# Altium PCB ATLAS_XP2V5.2016.11.14.PcbDoc (part 3 of 3)
Units mil, origin at the board's own origin, x right, y up, seen from the top; angles counter-clockwise.
Board outline 6300 x 9190 mil, 4 copper layers (Primary Component Side, Ground Plane, Power Plane, Secondary Component Side), stack 35.4 mil thick; 150 components, 213 nets, 1050 pads, 279 vias.
Unrouted connection lines stored in the file: 24.
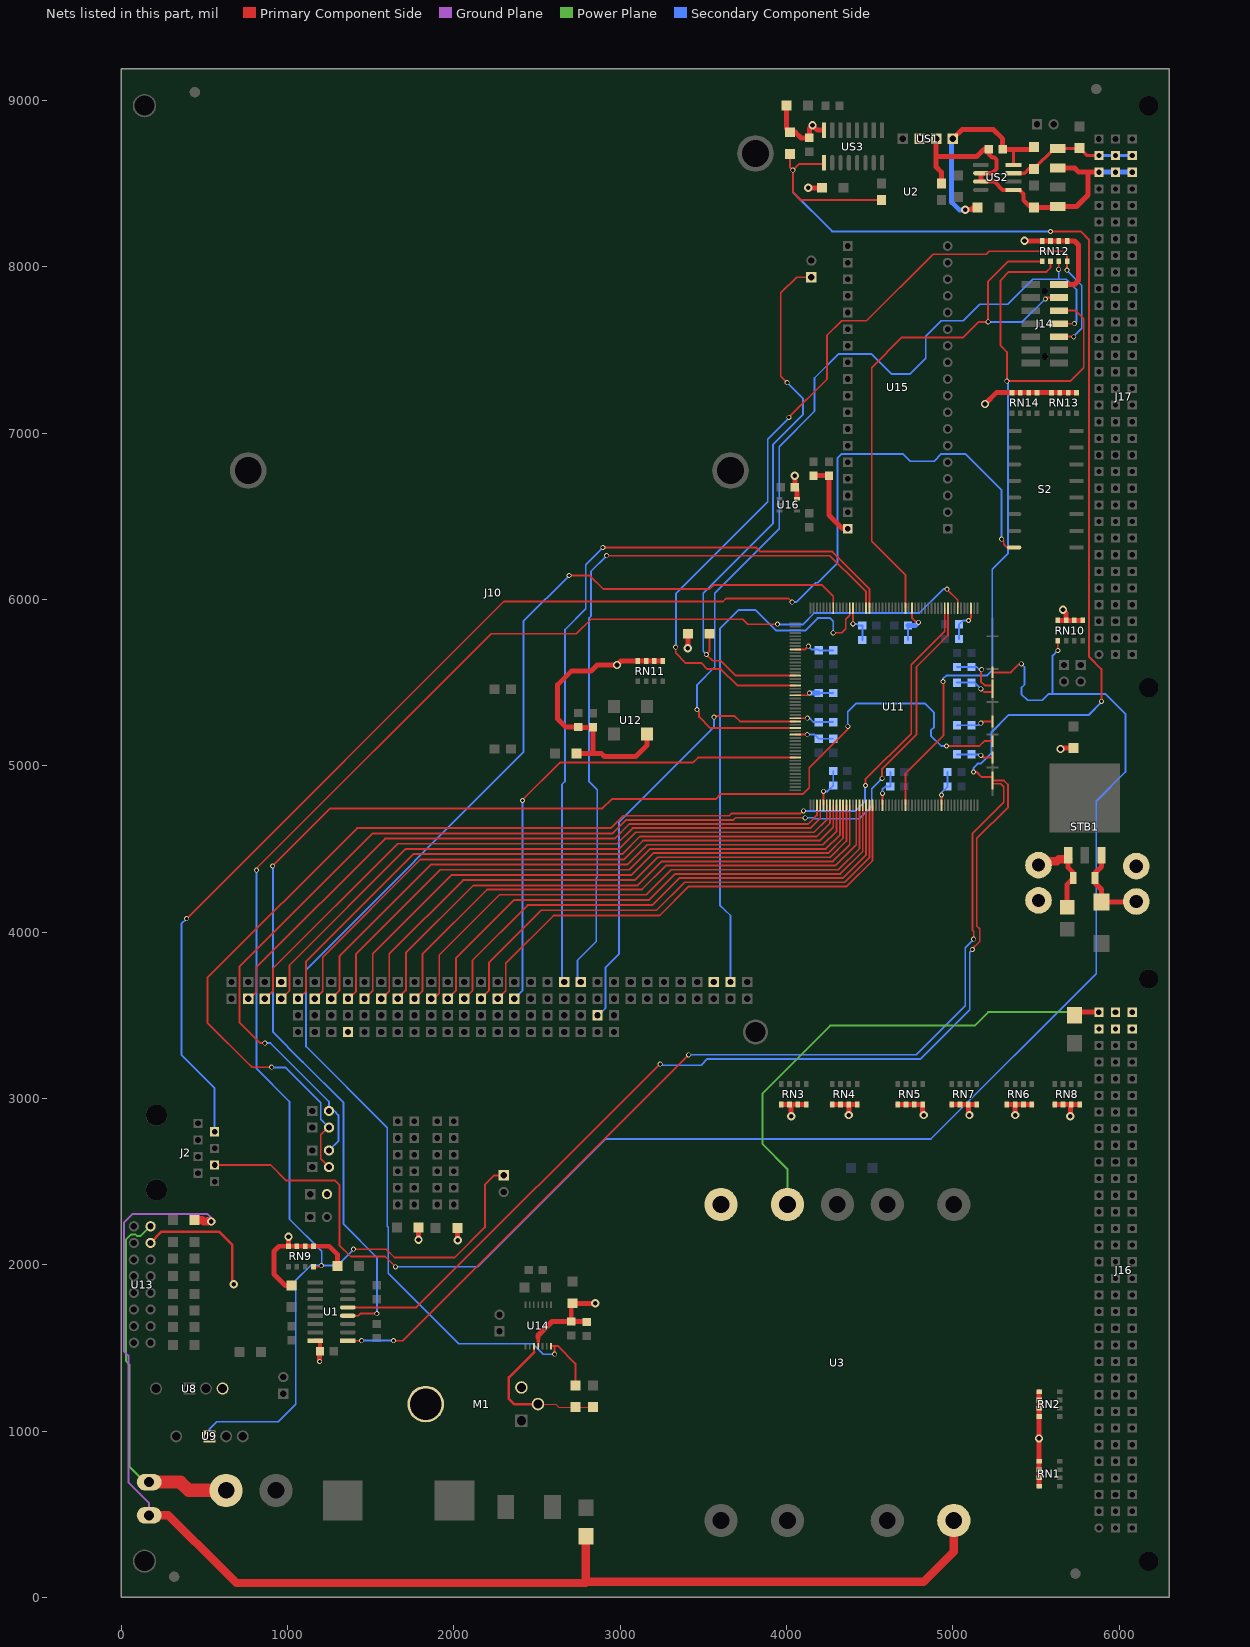
[diagram p5: the nets of this part, all layers, seen from the top]

## Via types
v1: diameter 30, hole 20, Primary Component Side to Secondary Component Side, 245 vias
v2: diameter 50, hole 28, Primary Component Side to Secondary Component Side, 34 vias

## Nets (pads, with @x,y where several pads share a name; then routed paths per layer and width w, separated by ;. In a path a pad name is that pad's centre, name@x,y a point inside that pad or via, vN(x,y) a via of type N, cw(c..) or ccw(c..) an arc to the next point about the centre after c; other vN are vias at no path point) (continued)
PPM_-485: J17.A2 J17.B2 J17.C2 R25.2 R32.2 US2.7 ZD3.2 | length 795.1
  Primary Component Side w20: US2.7@5364.75,8562.5 5431.25,8562.5 5457.5,8588.75 R25.2@5487.5,8588.75 5609.5,8710.75 ZD3.2@5631.25,8710.75 5759.5,8710.75 R32.2@5762.5,8713.75 5807.75,8668.5 J17.C2@5878.5,8668.5
  Secondary Component Side w20: J17.C2@5878.5,8668.5 J17.B2@5978.5,8668.5 J17.A2@6078.5,8668.5
PPM_GND: C1.2 J17.A3 J17.B3 J17.C3 R31.2 U2.2 US1.3 US2.2 US2.3 US2.5 ZD2.1 ZD3.1 | length 2270.7
  Primary Component Side w25: 5168.75,8525 US2.3@5168.75,8512.5 5250,8512.5 5300,8462.5 US2.5@5364.75,8462.5 5400,8462.5 5425,8437.5 5425,8400 5467.5,8357.5 R31.2@5487.5,8357.5 ; US2.2@5168.75,8550 US2.2@5168.75,8562.5 5237.5,8562.5 5262.5,8587.5 5262.5,8643.75 5250,8656.25 5237.5,8656.25 5216,8677.75 C1.2@5216,8706.25
  Primary Component Side w30: US1.3@4900,8768.75 4900,8662.5 ; U2.2@4931.25,8500 4931.25,8568.75 4900,8600 4900,8662.5 ; 5168.75,8525 US2.2@5168.75,8550 ; C1.2@5216,8706.25 5187.5,8706.25 5143.75,8662.5 4900,8662.5 ; R31.2@5487.5,8357.5 5626.25,8357.5 ZD2.1@5631.25,8362.5 5743.75,8362.5 5812.5,8431.25 5812.5,8568.5 ; ZD3.1@5631.25,8593.75 5731.25,8593.75 5756.5,8568.5 5812.5,8568.5 ; J17.C3@5878.5,8568.5 5812.5,8568.5
  Secondary Component Side w30: J17.C3@5878.5,8568.5 J17.B3@5978.5,8568.5 J17.A3@6078.5,8568.5
PPM_NOVI: R2.2 U2.4 U11.57 US3.1 | length 6994.9
  Primary Component Side w12: R2.2@4021.25,8678.75 4021.25,8597.5 4037.5,8581.25 4037.75,8581.25 v1(4038,8581) ; US3.1@4225,8625 4218.75,8618.75 4075.75,8618.75 v1(4038,8581) ; U2.4@4571.25,8400 4087.5,8400 4038,8450.5 v1(4038,8581) ; v1(5125,4962.5) 5143.75,4962.5 5174.95,4931.3 U11.57@5238.45,4931.3 ; v1(5587.5,8212.5) 5768.75,8212.5 5818.75,8162.5 5818.75,5656.25 5893.75,5581.25 v1(5893.75,5387.5)
  Secondary Component Side w12: v1(4038,8581) 4038,8449.5 4275,8212.5 v1(5587.5,8212.5) ; v1(5125,4962.5) 5125,4987.5 5150,5012.5 5168.75,5012.5 5231.25,5075 5231.25,5200 5337.5,5306.25 5818.75,5306.25 5893.75,5381.25 v1(5893.75,5387.5)
PPM_VCC: C1.1 R1.1 R25.1 US1.4 US2.8 | length 1261.3
  Primary Component Side w20: 5362.5,8706.25 5364.75,8704 US2.8@5364.75,8612.5
  Primary Component Side w30: US1.4@5000,8768.75 5056.25,8825 5243.75,8825 5300,8768.75 C1.1@5300,8706.25 5362.5,8706.25 5475,8706.25 R25.1@5487.5,8718.75 ; v2(5075,8342) 5076.75,8343.75 5112.5,8343.75 5125,8356.25 R1.1@5150,8356.25
  Secondary Component Side w30: US1.4@5000,8768.75 4993.75,8762.5 4993.75,8387.5 5039.25,8342 v2(5075,8342)
PWR_GOOD_TPS: R28.2 U11.149 U14.14 | length 8361.3
  Primary Component Side w11: U14.14@2584.78,1508.98 2588.3,1512.5 2606.25,1512.5 ; v1(2606.25,1462.5) 2606.25,1512.5 ; v1(2693.75,6143.75) 2818.75,6143.75 2900,6062.5 3537.5,6062.5 3562.5,6087.5 4212.5,6087.5 4281.65,6018.35 U11.149@4281.65,5947.2 ; R28.2@2731.25,1273.75 2731.25,1406.25 2625,1512.5 2606.25,1512.5
  Secondary Component Side w11: v1(2606.25,1462.5) 2537.5,1462.5 2475,1525 2031.25,1525 1606.25,1950 1606.25,2225 1600,2231.25 1600,2825 1112.5,3312.5 1112.5,3775 2418.75,5081.25 2418.75,5868.75 v1(2693.75,6143.75)
RES_DRV: J10.B2 U11.144 | length 3258.2
  Primary Component Side w11: v1(4281,5799) 4282,5800 4331.25,5800 4356.25,5825 4356.25,5881.25 4380.15,5905.15 U11.144@4380.15,5947.2
  Secondary Component Side w11: J10.B2@3663.75,3700 3663.75,4100 3600,4162.5 3600,5825 3712.5,5937.5 3812.5,5937.5 3937.5,5812.5 4112.5,5812.5 4187.5,5887.5 4262.5,5887.5 4281.25,5868.75 4281.25,5799.25 v1(4281,5799)
RESERVE1: J5.2 J6.2 U11.114 | length 7016
  Primary Component Side w11: v1(864,3332) 863,3333 835.75,3333 712.5,3456.25 712.5,3793.75 1512.5,4593.75 2956.25,4593.75 3037.5,4675 3681.25,4675 3693.75,4687.5 v1(4112.5,4687.5) ; v1(4575,4925) 4575,4981.25 4781.25,5187.5 4781.25,5593.75 4971.15,5783.65 U11.114@4971.15,5947.2
  Secondary Component Side w11: v1(864,3332) 865,3333 898.25,3333 1250,2981.25 J5.2@1250,2925 1281.25,2925 1306.25,2900 1306.25,2743.75 J6.2@1250,2687.5 ; v1(4112.5,4687.5) 4162.5,4687.5 4168.75,4681.25 4437.5,4681.25 4512.5,4756.25 4512.5,4862.5 v1(4575,4925)
RESERVE2: J7.2 J8.2 U11.115 | length 7356
  Primary Component Side w11: v1(905,3188) 787.5,3188 775.5,3200 775,3200 518.75,3456.25 518.75,3725 1418.75,4625 2943.75,4625 3018.75,4700 3656.25,4700 3668.75,4712.5 4083.5,4712.5 4100,4729 v1(4103,4729) ; J7.2@1250,2587.5 1200,2637.5 1200,2781.25 1243.75,2825 J8.2@1250,2825 ; v1(4475,4881.25) 4475,4918.75 4750,5193.75 4750,5606.25 4951.45,5807.7 U11.115@4951.45,5947.2
  Secondary Component Side w11: v1(905,3188) 906,3187 986.25,3187 1142,3031.25 1143.75,3031.25 1200,2975 1200,2875 J8.2@1250,2825 ; v1(4103,4729) 4416.5,4729 4471.75,4784.25 4471.75,4878 v1(4475,4881.25)
RESET_CPU: JP5.1 RN9.8 U9.1 U11.111 | length 10688.1
  Primary Component Side w11: v1(814,4372) 814,4382.75 2225,5793.75 2737.5,5793.75 2825,5881.25 3737.5,5881.25 3767.75,5851 v1(3946,5851) ; RN9.8@1156.25,1988.5 1199,1988.5 1204,1993.5 v1(1204,1995) ; v1(1397.5,2093.75) 1593.75,2093.75 1643.75,2043.75 2006.25,2043.75 2187.5,2225 2187.5,2481.25 2243.75,2537.5 JP5.1@2300,2537.5 ; v1(4965,6062) 5030.25,5996.75 U11.111@5030.25,5947.2
  Secondary Component Side w11: U9.1@531.25,968.75 531.25,1012.5 575,1056.25 943.75,1056.25 1050,1162.5 1050,1906.25 1138.75,1995 v1(1204,1995) ; v1(814,4372) 815,4371 815,3178.85 1012.5,2981.1 1012.5,2275 1206.25,2081.25 1206.25,1997.25 v1(1204,1995) ; v1(1397.5,2093.75) 1298.75,1995 v1(1204,1995) ; v1(3946,5851) 3947,5850 4100,5850 4168.75,5918.75 4800,5918.75 4943.25,6062 v1(4965,6062)
RST_DOF_EN: J18.1 R30.1 U11.173 | length 3429.5
  Primary Component Side w11: R30.1@3537.5,5793.75 3537.5,5687.5 v1(3518.75,5668.75) 3556.25,5631.25 3606.25,5631.25 3695.5,5542 U11.173@4053.75,5542 ; v1(4004,7303) 3966,7341 3966,7843.75 4062.5,7937.5 J18.1@4150,7937.5
  Secondary Component Side w11: v1(3518.75,5668.75) 3500,5687.5 3500,6037.5 3918.75,6456.25 3918.75,6931.25 4100,7112.5 4100,7206.9 4004,7301.65 v1(4004,7303)
SA0: J10.A31 U11.3 | length 4024.3
  Primary Component Side w11: J10.A31@763.75,3600 775,3600 812.5,3637.5 812.5,3787.5 1587.5,4562.5 2968.75,4562.5 3056.25,4650 4131.25,4650 4183.15,4701.9 U11.3@4183.15,4762.5
SA1: J10.A30 U11.4 | length 3947.1
  Primary Component Side w11: J10.A30@863.75,3600 868.75,3600 912.5,3643.75 912.5,3781.25 1662.5,4531.25 2981.25,4531.25 3075,4625 4143.75,4625 4202.85,4684.1 U11.4@4202.85,4762.5
SA2: J10.A29 U11.6 | length 3899
  Primary Component Side w11: J10.A29@963.75,3600 1012.5,3648.75 1012.5,3800 1712.5,4500 2993.75,4500 3093.75,4600 4165.75,4600 4242.25,4676.5 U11.6@4242.25,4762.5
SA3: J10.A28 U11.7 | length 3848.5
  Primary Component Side w11: J10.A28@1063.75,3600 1068.75,3600 1112.5,3643.75 1112.5,3825 1756.25,4468.75 3012.5,4468.75 3118.75,4575 4181.25,4575 4261.95,4655.7 U11.7@4261.95,4762.5
SA4: J10.A27 U11.8 | length 3796.9
  Primary Component Side w11: J10.A27@1163.75,3600 1168.75,3600 1212.5,3643.75 1212.5,3850 1800,4437.5 3025,4437.5 3137.5,4550 4200,4550 4281.65,4631.65 U11.8@4281.65,4762.5
SA5: J10.A26 U11.9 | length 3731.4
  Primary Component Side w11: J10.A26@1263.75,3600 1312.5,3648.75 1312.5,3856.25 1862.5,4406.25 3043.75,4406.25 3162.5,4525 4218.75,4525 4301.35,4607.6 U11.9@4301.35,4762.5
SA6: J10.A25 U11.10 | length 3675.5
  Primary Component Side w11: J10.A25@1363.75,3600 1368.75,3600 1412.5,3643.75 1412.5,3868.75 1918.75,4375 3056.25,4375 3181.25,4500 4237.5,4500 4321.05,4583.55 U11.10@4321.05,4762.5
SA7: J10.A24 U11.11 | length 3602.6
  Primary Component Side w11: J10.A24@1463.75,3600 1512.5,3648.75 1512.5,3868.75 1987.5,4343.75 3068.75,4343.75 3200,4475 4250,4475 4340.75,4565.75 U11.11@4340.75,4762.5
SA8: J10.A23 U11.12 | length 3535.7
  Primary Component Side w11: J10.A23@1563.75,3600 1568.75,3600 1612.5,3643.75 1612.5,3868.75 2056.25,4312.5 3087.5,4312.5 3225,4450 4262.5,4450 4360.45,4547.95 U11.12@4360.45,4762.5
SA9: J10.A22 U11.13 | length 3468.9
  Primary Component Side w11: J10.A22@1663.75,3600 1663.75,3601.25 1712.5,3650 1712.5,3875 2118.75,4281.25 3106.25,4281.25 3250,4425 4279.05,4425 4380.15,4526.1 U11.13@4380.15,4762.5
SA10: J10.A21 U11.15 | length 3404.9
  Primary Component Side w11: J10.A21@1763.75,3600 1812.5,3648.75 1812.5,3868.75 2200,4256.25 3131.25,4256.25 3275,4400 4293.75,4400 4419.55,4525.8 U11.15@4419.55,4762.5
SA11: J10.A20 U11.16 | length 3345.2
  Primary Component Side w11: J10.A20@1863.75,3600 1881.25,3600 1912.5,3631.25 1912.5,3862.5 2275,4225 3156.25,4225 3306.25,4375 4312.5,4375 4439.25,4501.75 U11.16@4439.25,4762.5
SA12: J10.A19 U11.17 | length 3253.6
  Primary Component Side w11: J10.A19@1963.75,3600 2012.5,3648.75 2012.5,3843.75 2362.5,4193.75 3175,4193.75 3331.25,4350 4324.15,4350 4458.95,4484.8 U11.17@4458.95,4762.5
SA13: J10.A18 U11.18 | length 3176.9
  Primary Component Side w11: J10.A18@2063.75,3600 2112.5,3648.75 2112.5,3831.25 2443.75,4162.5 3193.75,4162.5 3356.25,4325 4337.5,4325 4478.65,4466.15 U11.18@4478.65,4762.5
SA14: J10.A17 U11.19 | length 3099.7
  Primary Component Side w11: J10.A17@2163.75,3600 2163.75,3601.25 2212.5,3650 2212.5,3818.75 2525,4131.25 3218.75,4131.25 3387.5,4300 4350,4300 4498.35,4448.35 U11.19@4498.35,4762.5
SA15: J10.A16 U11.20 | length 3026.2
  Primary Component Side w11: J10.A16@2263.75,3600 2312.5,3648.75 2312.5,3812.5 2600,4100 3237.5,4100 3412.5,4275 4362.5,4275 4518.05,4430.55 U11.20@4518.05,4762.5
SA16: J10.A15 U11.198 | length 2962.1
  Primary Component Side w11: v1(2413,4791) 2413,4794.25 2637.5,5018.75 3437.5,5018.75 3468.25,5049.5 U11.198@4053.75,5049.5
  Secondary Component Side w11: J10.A15@2363.75,3600 2412.5,3648.75 2412.5,4791.5 v1(2413,4791)
SBHE: J10.C1 U11.187 | length 2592
  Primary Component Side w11: v1(3564,5292) 3572,5300 3687.5,5300 3721.3,5266.2 U11.187@4053.75,5266.2
  Secondary Component Side w11: J10.C1@2863.75,3500 2868.75,3500 2912.5,3543.75 2912.5,3787.5 2993.75,3868.75 2993.75,4662.5 3564,5232.75 v1(3564,5292)
SMEMR: J10.B12 U11.138 | length 4542.2
  Primary Component Side w11: v1(2896.25,6312) 3819,6312 3842.25,6287.5 4276,6287.5 4498.35,6064.15 U11.138@4498.35,5947.2
  Secondary Component Side w11: J10.B12@2663.75,3700 2650,3713.75 2650,4887.5 2668.75,4906.25 2668.75,5818.75 2793.75,5943.75 2793.75,6209.75 v1(2896.25,6312)
SMEMW: J10.B11 U11.139 | length 4433.6
  Primary Component Side w11: v1(2919.25,6263) 4261.5,6263 4437.5,6087.5 4478.65,6046.35 U11.139@4478.65,5947.2
  Secondary Component Side w11: J10.B11@2763.75,3700 2743.75,3720 2743.75,3831.25 2856.25,3943.75 2856.25,4325 2862.5,4331.25 2862.5,4856.25 2812.5,4906.25 2812.5,5887.5 2825,5900 2825,6169 v1(2919.25,6263)
TCK: J14.6 RN12.6 U11.30 | length 4903.1
  Primary Component Side w11: U11.30@4715.05,4762.5 4715.05,4952.55 4943.75,5181.25 4943.75,5503.25 v1(4941,5506) ; RN12.6@5587.5,8032.25 5587.5,7993.75 5562.5,7968.75 5337.5,7968.75 5287.5,7918.75 5287.5,7525 5325,7487.5 v1(5325,7312.5) 5706.25,7312.5 5787.5,7393.75 5787.5,7687.5 5738.75,7736.25 J14.6@5638.75,7736.25
  Secondary Component Side w11: v1(4941,5506) 4941,5522.25 4962.5,5543.75 5206.25,5543.75 5237.5,5575 5237.5,6181.25 5331.25,6275 5331.25,7306.25 v1(5325,7312.5)
TDI: J14.10 RN12.8 U11.176 | length 5387
  Primary Component Side w11: v1(3334,5713) 3334,5680.07 3392.3,5618.75 3487.5,5618.75 3525,5581.25 3606.25,5581.25 3704.6,5482.9 U11.176@4053.75,5482.9 ; v1(4014,7095) 4014,7095.25 4243.75,7325 4243.75,7587.5 4331.25,7675 4481.25,7675 4881.25,8075 5200,8075 5218.75,8093.75 5662.5,8093.75 5687.5,8068.75 RN12.8@5687.5,8032.25 5687.5,7980.5 v1(5687,7980) ; J14.10@5638.75,7578.75 5641.25,7581.25 5725,7581.25 v1(5727.25,7579)
  Secondary Component Side w11: v1(3334,5713) 3337,5716 3337,6037 3887.5,6587.5 3887.5,6962.5 4014,7089 v1(4014,7095) ; v1(5687,7980) 5687.5,7979.5 5687.5,7975 5775,7887.5 5775,7631 5727.25,7583.25 v1(5727.25,7579)
TDO: J14.8 RN12.7 U11.189 | length 5373.8
  Primary Component Side w11: v1(3462.5,5337.5) 3475,5325 3475,5293.75 3541.95,5226.8 U11.189@4053.75,5226.8 ; v1(5637,7985) 5637.5,7985.5 RN12.7@5637.5,8032.25 ; J14.8@5638.75,7657.53 5730.53,7657.53 v1(5731,7658)
  Secondary Component Side w11: v1(3462.5,5337.5) 3462.5,5487.5 3568.75,5593.75 3568.75,6037.5 3956.25,6425 3956.25,6918.75 4168.75,7131.25 4168.75,7331.25 4312.5,7475 4512.5,7475 4631.25,7356.25 4743.75,7356.25 4837.5,7450 4837.5,7581.25 4931.25,7675 5062.5,7675 5162.5,7775 5331.25,7775 5481.25,7925 5637.5,7925 ; v1(5637,7985) 5637,7925.5 5637.5,7925 ; v1(5731,7658) 5743.75,7670.25 5743.75,7862.5 5681.25,7925 5637.5,7925
TMS: J14.4 RN12.5 U11.127 | length 3449.6
  Primary Component Side w11: U11.127@4715.05,5947.2 4715.05,6147.45 4512.5,6350 4512.5,7393.75 4693.75,7575 5062.5,7575 5156.25,7668.75 v1(5212.5,7668.75) 5212.5,7912.5 5332.25,8032.25 RN12.5@5537.5,8032.25 ; v1(5556.25,7806.25) 5565.05,7815.05 J14.4@5638.75,7815.05
  Secondary Component Side w11: v1(5212.5,7668.75) 5418.75,7668.75 v1(5556.25,7806.25)
VCC_3V3: C9.1 C13.1 C14.1 C15.1 C16.1 C17.1 C18.1 C19.1 C20.1 C21.1 C22.1 C23.1 C24.1 C25.1 C26.1 C27.1 C28.1 C29.1 C30.1 C31.1 C32.1 C33.1 C34.1 C35.1 C36.1 C37.1 C38.1 C39.1 C40.1 C41.1 C46.1 C47.1 C48.1 C50.1 D4.1 J14.2 R15.2 R16.1 R30.2 RN10.1 RN10.2 RN10.3 RN10.4 RN11.1 RN11.2 RN11.3 RN11.4 RN12.1 RN12.2 RN12.3 RN12.4 RN13.1 RN13.2 RN13.3 RN13.4 RN14.1 RN14.2 RN14.3 RN14.4 STB1.3 U11.5 U11.23 U11.41 U11.63 U11.74 U11.83 U11.85 U11.107 U11.125 U11.143 U11.165 U11.179 U11.186 U11.191 U12.4 U15.36 U16.5 UR1.1 UR2.1 | length 8009.7
  Primary Component Side w11: U11.191@4053.75,5187.4 v1(4125.1,5187.4) ; U11.186@4053.75,5285.9 4125.9,5285.9 v1(4126,5286) ; U11.179@4053.75,5423.8 4123.8,5423.8 v1(4137.5,5437.5) ; U11.165@4053.75,5699.6 4112.1,5699.6 v1(4131.25,5718.75) ; U11.5@4222.55,4762.5 v1(4222.55,4846.2) ; U11.143@4399.85,5947.2 4400,5893.75 4399.85,5893.6 4399.85,5853.15 v1(4400,5853) ; U11.23@4577.15,4762.5 v1(4577.15,4834) ; U11.125@4754.45,5947.2 4754.45,5889.3 4781.25,5862.5 v1(4793.75,5862.5) ; U11.41@4931.75,4762.5 v1(4931.75,4824.5) ; v1(5095,5873) 5109.05,5887.05 U11.107@5109.05,5947.2 ; v1(5168.75,5062.5) 5181.75,5049.5 U11.63@5238.45,5049.5 ; v1(5168.75,5256.25) 5178.7,5266.2 U11.74@5238.45,5266.2 ; v1(5168.75,5462.5) 5187.75,5443.5 U11.83@5238.45,5443.5 ; v1(5174,5578) 5168.75,5572.75 5168.75,5506.25 5192.1,5482.9 U11.85@5238.45,5482.9 ; RN12.4@5536.5,8156.25 RN12.4@5537.5,8155.25
  Primary Component Side w20: U16.5@4062.5,6606.25 U16.5@4062.5,6612.5
  Primary Component Side w30: R16.1@2737.5,5075 2837.5,5075 ; U12.4@3162.5,5191.25 3162.5,5125 3093.75,5056.25 2906.25,5056.25 2887.5,5075 2837.5,5075 ; RN11.1@3256.25,5630.25 RN11.2@3206.25,5630.25 RN11.3@3156.25,5630.25 RN11.4@3106.25,5630.25 3005.25,5630.25 v2(2981.25,5606.25) 2862.5,5606.25 2825,5568.75 2706.25,5568.75 2625,5487.5 2625,5281.25 2673.25,5233 C39.1@2748.25,5233 2750,5231.25 C48.1@2837.5,5231.25 2837.5,5075 ; v2(3407.5,5707.5) R30.2@3407.5,5793.75 ; v2(4050,6743.75) C13.1@4050,6675 4062.5,6662.5 U16.5@4062.5,6612.5 ; C46.1@4162.5,6743.75 C9.1@4256.25,6743.75 4256.25,6506.25 4337.5,6425 U15.36@4368.75,6425 ; v2(5193.75,7175) 5261.5,7242.75 RN14.4@5356.25,7242.75 RN14.3@5406.25,7242.75 RN14.2@5456.25,7242.75 RN14.1@5506.25,7242.75 RN13.4@5593.75,7242.75 RN13.3@5643.75,7242.75 RN13.2@5693.75,7242.75 RN13.1@5743.75,7242.75 ; v2(5431.25,8156.25) RN12.4@5536.5,8156.25 ; RN12.4@5537.5,8155.25 RN12.3@5587.5,8155.25 RN12.2@5637.5,8155.25 RN12.1@5687.5,8155.25 5732.25,8155.25 5756.25,8131.25 5756.25,7918.75 5731.25,7893.75 J14.2@5638.75,7893.75 ; RN10.4@5631.25,5874 RN10.3@5681.25,5874 ; v2(5648,5101) 5648,5102 5652.25,5106.25 5723.75,5106.25 R15.2@5725,5107.5 ; v2(5662.5,5937.5) 5681.25,5918.75 RN10.3@5681.25,5874 ; RN10.1@5781.25,5874 RN10.2@5731.25,5874 RN10.3@5681.25,5874 ; STB1.3@5893.75,4462.5 5893.75,4393.75 5855,4355 D4.1@5855,4325 5855,4295 5893.75,4256.25 C41.1@5893.75,4181.25 6100,4181.25 UR2.1@6103.12,4184.37
  Ground Plane w11: v1@4131.25,5712.5 v1(4131.25,5718.75) ; v1@4575,4836.15 v1(4577.15,4834) ; v1@5156.25,5062.5 v1(5168.75,5062.5) ; v1@5171.75,5578 v1(5174,5578)
  Ground Plane w30: v1@4399.85,5852.85 v1(4400,5853)
  Secondary Component Side w11: v1(4125.1,5187.4) 4168.85,5187.4 C35.1@4193.75,5162.5 C14.1@4281.25,5162.5 ; v1(4126,5286) 4139,5286 4162.5,5262.5 C15.1@4193.75,5262.5 C36.1@4281.25,5262.5 ; v1(4131.25,5718.75) 4150.4,5699.6 4187.9,5699.6 C38.1@4193.75,5693.75 C19.1@4281.25,5693.75 ; C37.1@4193.75,5437.5 C18.1@4281.25,5437.5 ; v1(4222.55,4846.2) 4246.2,4846.2 C16.1@4281.25,4881.25 C27.1@4281.25,4968.75 ; v1(4400,5853) 4422,5853 4431.25,5843.75 C50.1@4456.25,5843.75 C20.1@4456.25,5756.25 ; v1(4577.15,4834) 4577.15,4858.4 4593.75,4875 C17.1@4625,4875 C25.1@4625,4962.5 ; C21.1@4731.25,5756.25 C40.1@4731.25,5843.75 ; v1(4931.75,4824.5) 4931.75,4838 C29.1@4968.75,4875 C47.1@4968.75,4962.5 ; C28.1@5025,5068.75 C31.1@5112.5,5068.75 5162.5,5068.75 v1(5168.75,5062.5) ; C24.1@5025,5243.75 C30.1@5112.5,5243.75 5156.25,5243.75 v1(5168.75,5256.25) ; C23.1@5025,5500 C32.1@5112.5,5500 5131.25,5500 v1(5168.75,5462.5) ; C26.1@5025,5593.75 C33.1@5112.5,5593.75 5143.75,5593.75 5162.5,5575 5171,5575 v1(5174,5578) ; C22.1@5037.5,5762.5 C34.1@5037.5,5850 5062.5,5873 v1(5095,5873)
  Secondary Component Side w30: v1(4137.5,5437.5) C37.1@4193.75,5437.5 ; C40.1@4731.25,5843.75 4775,5843.75 v1(4793.75,5862.5)
VCC_+5V: C6.1 C7.1 C42.1 D3.2 D4.2 J3.2 J10.B3 J10.B29 J10.D16 J16.A1 J16.A2 J16.B1 J16.B2 J16.C1 J16.C2 M1.2 M1.4 R2.1 R4.1 R5.1 R6.1 R7.1 R13.1 R14.1 R27.1 R28.1 RN1.1 RN1.2 RN1.3 RN1.4 RN2.1 RN2.2 RN2.3 RN2.4 RN3.1 RN3.2 RN3.3 RN3.4 RN4.1 RN4.2 RN4.3 RN4.4 RN5.1 RN5.2 RN5.3 RN5.4 RN6.1 RN6.2 RN6.3 RN6.4 RN7.1 RN7.2 RN7.3 RN7.4 RN8.1 RN8.2 RN8.3 RN8.4 RN9.1 RN9.2 RN9.3 RN9.4 STB1.1 U1.16 U3.6 U8.3 U13.7 U14.10 UR3.1 UR4.1 US1.2 US3.16 | length 8909.5
  Primary Component Side w6: M1.2@2506.25,1162.5 2613.12,1162.5 2631.88,1143.75 R28.1@2731.25,1143.75 R27.1@2837.5,1143.75
  Primary Component Side w12: 2482.42,1473.83 U14.10@2482.42,1508.98
  Primary Component Side w15: U13.7@177,2131.25 243.75,2200 587.5,2200 668.75,2118.75 668.75,1892.25 v2(678,1883) ; 2482.42,1473.83 2331.25,1322.67 2331.25,1193.75 2362.5,1162.5 M1.2@2506.25,1162.5
  Primary Component Side w25: U1.16@1166.5,1543.75 1195.36,1543.75 C6.1@1195.36,1479.38 ; 4208.5,8821 US3.16@4225,8821
  Primary Component Side w30: v2(1006.25,2168.75) RN9.4@1006.25,2111.5 ; R13.1@1025,1875 987.5,1875 918.75,1943.75 918.75,2081.25 949,2111.5 RN9.4@1006.25,2111.5 ; v1(1193.75,1418.75) 1193.75,1479.38 C6.1@1195.36,1479.38 ; R14.1@1300,1993.75 1300,2062.5 1251,2111.5 RN9.1@1156.25,2111.5 RN9.2@1106.25,2111.5 RN9.3@1056.25,2111.5 RN9.4@1006.25,2111.5 ; v2(1787.5,2150) R7.1@1787.5,2225 ; R4.1@2021.25,2221.25 2021.25,2149.75 v2(2023,2148) ; RN3.1@3968.75,2963.5 RN3.2@4018.75,2963.5 ; R5.1@4000,8968.75 4000,8830 R2.1@4021.25,8808.75 4053.75,8808.75 4087.5,8775 C7.1@4137.5,8775 4137.5,8831.25 v2(4156.25,8850) 4185.25,8821 4208.5,8821 ; v2(4028,2893) 4028,2954.25 RN3.2@4018.75,2963.5 ; RN3.4@4118.75,2963.5 RN3.3@4068.75,2963.5 RN3.2@4018.75,2963.5 ; v2(4131.25,8475) R6.1@4212.5,8475 ; RN4.1@4275,2963.5 RN4.2@4325,2963.5 RN4.3@4375,2963.5 ; v2(4375,2900) RN4.3@4375,2963.5 ; RN4.4@4425,2963.5 RN4.3@4375,2963.5 ; RN5.1@4668.75,2963.5 RN5.2@4718.75,2963.5 RN5.3@4768.75,2963.5 RN5.4@4818.75,2963.5 4818.75,2906.25 v2(4825,2900) ; RN7.1@4993.75,2963.5 RN7.2@5043.75,2963.5 RN7.3@5093.75,2963.5 ; v2(5100,2900) 5093.75,2906.25 RN7.3@5093.75,2963.5 ; RN7.4@5143.75,2963.5 RN7.3@5093.75,2963.5 ; RN6.1@5325,2963.5 RN6.2@5375,2963.5 ; v2(5375,2900) RN6.2@5375,2963.5 ; RN6.4@5475,2963.5 RN6.3@5425,2963.5 RN6.2@5375,2963.5 ; RN1.4@5519.75,668.75 RN1.3@5519.75,718.75 RN1.2@5519.75,768.75 RN1.1@5519.75,818.75 5519.75,881.5 5518.75,882.5 v2(5518.75,956.25) 5519.75,957.25 RN2.4@5519.75,1087.5 RN2.3@5519.75,1137.5 RN2.2@5519.75,1187.5 RN2.1@5519.75,1237.5 ; RN8.1@5612.5,2963.5 RN8.2@5662.5,2963.5 RN8.3@5712.5,2963.5 ; C42.1@5687.5,4150 5687.5,4287.5 D4.2@5725,4325 5725,4356.25 5693.75,4387.5 5693.75,4437.5 STB1.1@5693.75,4462.5 ; v2(5706.25,2893.75) 5706.25,2957.25 RN8.3@5712.5,2963.5 ; D3.2@5731.25,3501.25 5731.25,3506 5743.75,3518.5 J16.C1@5878.5,3518.5 ; RN8.4@5762.5,2963.5 RN8.3@5712.5,2963.5
  Primary Component Side w50: UR4.1@5515.62,4403.12 5515.62,4426.37 5626.62,4426.37 5637.75,4437.5 STB1.1@5693.75,4437.5
  Ground Plane w30: v2(678,1883) v2@679.75,1881.25 ; v2@2021,2150 v2(2023,2148) ; v2@4368,2893 v2(4375,2900)
  Ground Plane w50: J16.C1@5878.25,3518.75 J16.C1@5878.5,3518.5
  Power Plane w12: U3.6@4006.25,2362.5 4006.25,2575 3856.25,2725 3856.25,3031.25 4262.5,3437.5 5131.25,3437.5 5212.25,3518.5 J16.C1@5878.5,3518.5
VCC_+12V: REG1.1 S1.1 U13.8 | length 2288
  Primary Component Side w80: REG1.1@168.75,693.75 356.25,693.75 406.25,643.75 S1.1@631.25,643.75 625,650 S1.1@593.75,650
  Power Plane w12: REG1.1@168.75,693.75 143.75,693.75 50,787.5 50,1400 28,1422 28,2150.72 58.53,2181.25 88.06,2181.25 96.02,2173.29 117.04,2173.29 175,2231.25 U13.8@175,2248.88 ; S1.1@631.25,643.75 643.75,631.25 S1.1@643.75,618.75
VCC_-12V: D2.1 R24.2 REG1.2 U3.4 | length 8361.3
  Primary Component Side w50: REG1.2@168.75,493.75 283.88,493.75 611.25,168.75 611.83,168.75 693.08,87.5 2793.48,87.5 2793.48,168.75 D2.1@2793.75,368.75 2793.75,93.75 4825,93.75 5006.25,275 U3.4@5006.25,462.5 ; R24.2@442.5,2268.75 487.25,2268.75 496,2260 v2(542,2260)
  Ground Plane w12: REG1.2@168.75,493.75 168.75,567.58 43.75,692.58 43.75,1453.5 16,1481.25 16,2253.5 68.75,2306.25 518.75,2306.25 542,2283 v2(542,2260) 520.75,2281.25
  Power Plane w50: v2@541,2260 v2(542,2260)
VCCVICOR: C44.2 C45.1 M1.3 R26.1 U3.5 U14.11 | length 646.3
  Primary Component Side w12: 2506.25,1562.5 2508.02,1560.73 ; U14.11@2508.02,1508.98 2508.02,1539.27
  Primary Component Side w20: 2508.02,1539.27 2508.02,1560.73
  Primary Component Side w30: 2506.25,1562.5 2506.25,1575 2590.25,1659 C44.2@2706.25,1659 ; C45.1@2800,1656.25 2797.25,1659 C44.2@2706.25,1659 ; v2(2850,1768.75) R26.1@2712.5,1768.75 2706.25,1762.5 C44.2@2706.25,1659
WDT_OUT_STARI: U1.5 U11.56 | length 6054.3
  Primary Component Side w11: U1.5@1362.5,1743.75 1775,1743.75 3231.25,3200 3235,3200 v1(3241,3206) ; v1(5118,3895) 5118,3899.25 5162.5,3943.75 5162.5,4019.5 5143.75,4036.75 5143.75,4563.27 5331.25,4748.83 5331.25,4887.5 5307.15,4911.6 U11.56@5238.45,4911.6
  Secondary Component Side w11: v1(3241,3206) 3247,3200 3487.5,3200 3525,3237.5 4806.25,3237.5 5102,3533.25 5102,3879 v1(5118,3895)
WDT_SIG_STARI: U1.4 U11.68 | length 8225
  Primary Component Side w11: v1(911,4397) 911,4398.5 1256.25,4743.75 2893.75,4743.75 2950,4800 3575,4800 3606.25,4831.25 4100,4831.25 4137.5,4868.75 4137.5,4987.5 4368.75,5218.75 v1(4368.75,5237.5) ; U1.4@1362.5,1693.75 1425,1693.75 1437.5,1706.25 v1(1537.5,1706.25) ; v1(4962.5,5118.75) 5160.25,5118.75 5189.5,5148 U11.68@5238.45,5148
  Secondary Component Side w11: v1(911,4397) 913,4399 913,3399.92 1093.33,3218.75 1093.75,3218.75 1337.5,2975 1337.5,2243.75 1537.5,2043.75 v1(1537.5,1706.25) ; v1(4368.75,5237.5) 4368.75,5325 4418.75,5375 4831.25,5375 4887.5,5318.75 4887.5,5231.25 4868.75,5212.5 4868.75,5181.25 4931.25,5118.75 v1(4962.5,5118.75)
WDT_TRG: U1.1 U11.55 | length 6042.4
  Primary Component Side w11: U1.1@1362.5,1543.75 1445.75,1543.75 v1(1446,1544) ; v1(1637.5,1543.75) 1693.75,1543.75 v1(3412.5,3262.5) ; v1(5126,3957.25) 5126,4004.25 5118.75,4009.5 5118.75,4593.75 5306.25,4781.25 5306.25,4875 5289.35,4891.9 U11.55@5238.45,4891.9
  Secondary Component Side w11: v1(1446,1544) 1637.25,1544 v1(1637.5,1543.75) ; v1(3412.5,3262.5) 4781.25,3262.5 5075,3556.25 5075,3906.25 v1(5126,3957.25)
XP_PRESENT_IN: J2.6 RN10.5 U11.89 | length 9560.5
  Primary Component Side w11: J2.6@562.5,2600 900,2600 993.75,2506.25 1287.5,2506.25 1312.5,2481.25 1312.5,2118.75 1381.25,2050 1587.5,2050 v1(1649.75,1988) ; U11.89@5238.45,5561.7 5349.2,5561.7 5400,5612.5 v1(5412.5,5612.5) ; v1(5631.25,5693.25) RN10.5@5631.25,5751
  Secondary Component Side w11: v1(1649.75,1988) 2144.08,1988 2912.58,2756.25 4868.75,2756.25 5862.5,3750 5862.5,4787.5 6037.5,4962.5 6037.5,5312.5 5918.75,5431.25 5600,5431.25 ; v1(5412.5,5612.5) 5431.25,5593.75 5431.25,5487.5 5412.5,5468.75 5412.5,5431.25 5450,5393.75 5537.5,5393.75 5575,5431.25 5600,5431.25 ; v1(5631.25,5693.25) 5600,5662.5 5600,5431.25
XP_PRESENT_OUT: J2.2 S2.8 | length 8349.8
  Primary Component Side w11: v1(393.75,4081.25) 2300,5987.5 3618.75,5987.5 3637.5,6006.25 4012.5,6006.25 v1(4034.75,5984) ; v1(5293.75,6362.5) 5306.25,6350 5306.25,6331.25 5325,6312.5 S2.8@5368.75,6312.5
  Secondary Component Side w11: v1(393.75,4081.25) 362.5,4050 362.5,3262.5 562.5,3062.5 J2.2@562.5,2800 ; v1(4034.75,5984) 4059,5984 4175,6100 4187.5,6100 4306.25,6218.75 4306.25,6850 4331.25,6875 4700,6875 4743.75,6831.25 4887.5,6831.25 4931.25,6875 5075,6875 5293.75,6656.25 v1(5293.75,6362.5)
pads on no net: J2.HOLE31 J2.HOLE32 J10.A1 J10.A10 J10.B5 J10.B6 J10.B7 J10.B8 J10.B9 J10.B15 J10.B16 J10.B17 J10.B18 J10.B19 J10.B20 J10.B21 J10.B22 J10.B23 J10.B24 J10.B25 J10.B26 J10.B27 J10.B30 J10.C6 J10.C7 J10.C8 J10.C9 J10.C10 J10.D1 J10.D8 J10.D9 J10.D10 J10.D11 J10.D12 J10.D13 J10.D14 J10.D15 J10.D17 J10.PAD2 J10.PAD4 J10.PAD5 J10.PAD6 J14.12 J14.14 J14.15 J14.16 J16.A6 J16.A7 J16.A16 J16.A17 J16.A18 J16.A19 J16.A20 J16.A21 J16.A22 J16.A23 J16.A24 J16.A25 J16.A26 J16.A27 J16.A28 J16.A29 J16.A30 J16.B6 J16.B7 J16.C6 J16.C7 J16.HOLE3 J16.HOLE4 J17.A4 J17.A5 J17.A6 J17.A7 J17.A8 J17.A9 J17.A10 J17.A11 J17.A12 J17.A13 J17.A14 J17.A15 J17.A16 J17.A17 J17.A18 J17.A19 J17.A20 J17.A21 J17.A22 J17.A23 J17.A24 J17.A25 J17.A26 J17.A27 J17.A28 J17.A29 J17.A30 J17.A31 J17.A32 J17.B4 J17.B5 J17.B6 J17.B7 J17.B8 J17.B9 J17.B10 J17.B11 J17.B12 J17.B13 J17.B14 J17.B15 J17.B16 J17.B17 J17.B18 J17.B19 J17.B20 J17.B21 J17.B22 J17.B23 J17.B24 J17.B25 J17.B26 J17.B27 J17.B28 J17.B29 J17.B30 J17.B31 J17.B32 J17.C4 J17.C5 J17.C6 J17.C7 J17.C8 J17.C9 J17.C10 J17.C11 J17.C12 J17.C13 J17.C14 J17.C15 J17.C16 J17.C17 J17.C18 J17.C19 J17.C20 J17.C21 J17.C22 J17.C23 J17.C24 J17.C25 J17.C26 J17.C27 J17.C28 J17.C29 J17.C30 J17.C31 J17.C32 J17.HOLE3 J17.HOLE4 RN1.5 RN10.6 RN13.8 RN14.8 S2.7 U1.12 U3.2 U3.3 U5.1 U8.2 U9.2 U11.1 U11.2 U11.24 U11.27 U11.39 U11.40 U11.42 U11.43 U11.44 U11.45 U11.46 U11.47 U11.48 U11.49 U11.51 U11.52 U11.53 U11.54 U11.59 U11.60 U11.61 U11.62 U11.64 U11.65 U11.103 U11.104 U11.105 U11.106 U11.135 U11.146 U11.153 U11.154 U11.155 U11.156 U11.157 U11.158 U11.159 U11.160 U11.161 U11.162 U11.163 U11.164 U11.166 U11.167 U11.171 U11.172 U11.175 U11.177 U11.207 U11.208 U14.3 U15.1 U15.34 UR5.1 UR6.1 UR7.1 UR8.1 UR9.1 UR10.1 UR11.1 UR12.1 US3.4 US3.5 US3.6 US3.7 US3.9 US3.10 US3.11 US3.12

## Polygon pours and split planes (outlines as drawn)
$$$9820 on Primary Component Side "Primary Component Side-$$$9820" (solid, remove dead copper, pour order 0): 2625,437.5 2675,487.5 3362.5,487.5 3362.5,331.25 3743.75,331.25 3743.75,631.25 3518.75,856.25 2543.75,856.25 2543.75,437.5
VCC_-12V on Primary Component Side "Primary Component Side-VCC_-12V" (solid, remove dead copper, pour order 10): 156.25,387.5 300,387.5 456.25,231.25 456.25,181.25 587.5,50 4975,50 5162.5,237.5 5162.5,631.25 4856.25,631.25 4856.25,237.5 4800,181.25 3031.25,181.25 2975,237.5 2656.25,237.5 2575,156.25 718.75,156.25 350,525 156.25,525
GND on Ground Plane "Ground Plane-GND" (solid, remove dead copper, pour order 2): 5600,362.5 6256.25,362.5 6256.25,5138.19 6078.47,5315.97 6078.47,5531.25 6014.24,5595.49 5893.75,5595.49 5832.12,5657.12 5832.12,8237.5 5791.06,8278.56 4650,8278.56 4617.4,8311.15 4617.4,8517.4 4656.25,8556.25 4806.25,8556.25 4831.25,8581.25 4831.25,9162.5 18.75,9162.5 18.75,918.75 4350,918.75 4462.5,1031.25 4462.5,2470.06 4511.85,2519.4 4818.75,2519.95 4818.75,2287.5 5162.5,1943.75 5162.5,800
VCCVICOR on Power Plane "Power Plane-VCCVICOR" (solid, remove dead copper, pour order 4): 3712.5,2531.25 2637.5,2531.25 2637.5,2200 2237.5,2200 2237.5,1525 2243.75,1518.75 2243.75,1356.25 2375,1225 2425,1225 2462.5,1262.5 3087.5,1262.5 3712.5,1887.5
VCC_+5V on Power Plane "Power Plane-VCC_+5V" (solid, remove dead copper, pour order 6): 1875,6043.75 2343.75,6512.5 2343.75,7125 3518.75,8300 4406.25,8300 4681.25,8575 4800,8575 4825,8600 4825,9143.75 31.25,9143.75 31.25,881.25 781.25,881.25 806.25,912.5 806.25,1037.5 862.5,1093.75 1168.75,1093.75 1656.25,606.25 5812.5,606.25 5812.5,3337.5 5868.75,3393.75 6131.25,3393.75 6131.25,3600 5906.25,3825 5809.98,3825 5725,3900.92 5725,4481.25 5456.25,4481.25 5287.5,4312.5 5287.5,3931.25 5618.75,3600 5825,3600 5862.5,3562.5 5862.5,3462.5 5750,3462.5 5700,3412.5 5700,3212.5 5481.25,2993.75 3956.25,2993.75 3956.25,2775 4200,2531.25 4200,1975 3318.75,1093.75 2575,1093.75 2575,1218.75 2475,1218.75 2462.5,1206.25 2462.5,925 2093.75,925 2093.75,3131.25 2256.25,3293.75 3012.5,3293.75 3181.25,3462.5 3625,3462.5 3743.75,3581.25 3743.75,3806.25 3650,3900 2512.5,3900 1875,4537.5
VCC_3V3 on Power Plane "Power Plane-VCC_3V3" (solid, remove dead copper, pour order 8): 6025,4050 6231.25,4050 6231.25,5031.25 5737.5,5525 5737.5,8237.5 4800,8237.5 3993.75,7431.25 3993.75,6431.25 3512.5,6431.25 2931.25,5850 2931.25,5506.25 3768.75,4668.75 4481.25,4668.75 4487.5,4675 5818.75,4675 5987.5,4506.25 5987.5,4087.5

## Keep-outs
Keep-Out Layer:
  the board outline again, w10

## Other copper
Primary Component Side:
  region net $$$9821: 831.25,568.75 887.5,512.5 887.5,456.25 1462.5,456.25 1462.5,881.25 893.75,881.25 831.25,818.75 831.25,568.75
  region net $$$9820: 3437.5,600 3437.5,331.25 3737.5,331.25 3743.75,625 3475,600 3437.5,600
  region net $$$9822: 2362.5,775 2362.5,300 1868.75,300 1868.75,775 2362.5,775
  text "v1.1" at 1425,8306.25 h42.5
  text "ATLAS_XP2" at 362.5,8300 h110
Secondary Component Side:
  text "ATLAS_XP2" at 1368.75,8312.5 h110
  text "v1.1" at 293.75,8300 h42.5

## Silkscreen, mask and mechanical layers (free items; w line width, h text height)
Silkscreen Top:
  region: 5550,7075 5550,7062.5 5468.75,7062.5 5468.75,7075 5550,7075
  lines w1: -208,0 -208,9300 ; -100,0 -100,9300
  lines w5: 4206.25,4325 5131.25,4325 ; 4206.25,4381.25 5131.25,4381.25 ; 4306.25,4212.5 4306.25,4437.5 4306.25,4493.75 ; 4393.75,4437.5 4406.25,4437.5 ; 4406.25,3981.25 4406.25,4168.75 ; 4406.25,4212.5 4406.25,4437.5 ; 4412.5,4493.75 4206.25,4493.75 4206.25,4437.5 ; 5556.25,7087.5 5681.25,7087.5 5681.25,7050 5431.25,7050 5431.25,7087.5 5575,7087.5 ; 4206.25,4043.75 4206.25,4106.25 ; 4206.25,4043.75 5131.25,4043.75 ; 4206.25,4043.75 4206.25,3981.25 5131.25,3981.25 5131.25,4043.75 ; 4206.25,4106.25 5131.25,4106.25 ; 4206.25,4106.25 4206.25,4168.75 5131.25,4168.75 5131.25,4106.25 ; 4206.25,4268.75 4206.25,4212.5 5131.25,4212.5 5131.25,4268.75 ; 4206.25,4268.75 4206.25,4437.5 ; 4206.25,4268.75 5131.25,4268.75 ; 4206.25,4437.5 5131.25,4437.5 ; 4406.25,4437.5 4406.25,4493.75 5131.25,4493.75 5131.25,4437.5 ; 5131.25,4043.75 5131.25,4106.25 ; 5131.25,4268.75 5131.25,4437.5 ; 5550,7062.5 5550,7075 5631.25,7075 5631.25,7062.5 5550,7062.5
  lines w10: 5525,6118.75 5643.75,6237.5 ; 5587.5,6237.5 5643.75,6237.5 ; 5643.75,6181.25 5643.75,6237.5
  text "TERM_485" at 5256.25,8924.84 h42.5
  text "ATLAS_XP2" at 1893.75,8454.38 h110
  text "v1.1" at 3143.75,8449.84 h42.5
  text "RST_DOF_DSBL" at 3956.25,8123.66 h25.5
  text "1" at 5393.75,7054.91 h25.5
  text "0" at 5700,7054.91 h25.5
  text "A5" at 5200,6987.34 h42.5
  text "A4" at 5200,6874.84 h42.5
  text "A3" at 5200,6781.09 h42.5
  text "A2" at 5200,6681.09 h42.5
  text "A1" at 5200,6593.59 h42.5
  text "A0" at 5200,6487.34 h42.5
  text "XP_PRESENT_OUT" at 4718.75,6081.09 h42.5
  text "BBRAM" at 4481.25,4448.44 h25
  text "BASE ADDRESS" at 4681.25,4448.44 h25
  text "OFF" at 4212.5,4392.19 h25
  text "OFF" at 4312.5,4392.19 h25
  text "0x140" at 4662.5,4392.41 h25.5
  text "0x148" at 4662.5,4336.16 h25.5
  text "OFF" at 4212.5,4335.94 h25
  text "ON" at 4325,4335.94 h25
  text "ON" at 4225,4279.69 h25
  text "OFF" at 4312.5,4279.69 h25
  text "0x160" at 4662.5,4279.91 h25.5
  text "ON" at 4225,4223.44 h25
  text "ON" at 4325,4223.44 h25
  text "0x168" at 4662.5,4223.66 h25.5
  text "RST_DOF" at 4643.75,4123.66 h25.5
  text "J18" at 4262.5,4117.41 h25.5
  text "RST_DOF_DISABLE" at 4537.5,4061.16 h25.5
  text "ON" at 4275,4060.94 h25
  text "RST_DOF_ENABLE" at 4556.25,3998.66 h25.5
  text "OFF" at 4268.75,3992.19 h25
  text "RESET_CPU" at 2381.25,2421.12 h34
  text "VCC" at 912.5,2393.59 h42.5
  text "GND" at 912.5,2268.59 h42.5
  text "OV" at 2100,1624.84 h42.5
  text "PTA_ADDR" at 1062.5,1231.09 h42.5
Silkscreen Bottom:
  region: 3193.75,8750 3193.75,8987.5 2200,8987.5 2200,8750 3193.75,8750
  text "Module Ser.No." at 3028.75,9024.84 h42.5
  text "M.S." at 3580.83,8856.09 h42.5
  text "v1.1" at 1880.83,8462.34 h42.5
  text "ATLAS_XP2" at 3133.87,8460.62 h110
  text "IMP Automatika d.o.o." at 4103.98,7973.59 h182.5
  text "http://www.institutepupin.com" at 4143.97,7607.97 h132.5
  text "Beograd, Srbija" at 3067.98,7309.53 h107.5
Drill Drawing:
  lines w10: -280.57,-3477.4 3454.43,-3477.4 ; -280.57,-3472.4 -280.57,-472.4 ; -280.57,-467.4 3454.43,-467.4 ; -275.57,-3272.4 3449.43,-3272.4 ; -275.57,-3122.4 3449.43,-3122.4 ; -275.57,-2972.4 3449.43,-2972.4 ; -275.57,-2822.4 3449.43,-2822.4 ; -275.57,-2672.4 3449.43,-2672.4 ; -275.57,-2522.4 3449.43,-2522.4 ; -275.57,-2372.4 3449.43,-2372.4 ; -275.57,-2222.4 3449.43,-2222.4 ; -275.57,-2072.4 3449.43,-2072.4 ; -275.57,-1922.4 3449.43,-1922.4 ; -275.57,-1772.4 3449.43,-1772.4 ; -275.57,-1622.4 3449.43,-1622.4 ; -275.57,-1472.4 3449.43,-1472.4 ; -275.57,-1322.4 3449.43,-1322.4 ; -275.57,-1172.4 3449.43,-1172.4 ; -275.57,-1022.4 3449.43,-1022.4 ; -275.57,-872.4 3449.43,-872.4 ; -275.57,-867.4 3449.43,-867.4 ; -275.57,-672.4 3449.43,-672.4 ; -275.57,-667.4 3449.43,-667.4 ; -143.07,-2897.4 -43.07,-2897.4 ; -143.07,-2797.4 -43.07,-2697.4 ; -143.07,-2697.4 -43.07,-2797.4 ; -143.07,-947.4 -43.07,-947.4 ; -118.07,-1697.4 -68.07,-1697.4 ; -118.07,-1397.4 -68.07,-1397.4 ; -118.07,-1272.4 -68.07,-1222.4 ; -118.07,-1222.4 -68.07,-1272.4 ; -108.07,-2602.4 -98.07,-2612.4 -88.07,-2612.4 -78.07,-2602.4 ; -103.07,-3047.4 -83.07,-3047.4 ; -93.07,-3057.4 -93.07,-3037.4 ; -93.07,-2947.4 -93.07,-2847.4 ; -93.07,-1722.4 -93.07,-1672.4 ; -93.07,-1422.4 -93.07,-1372.4 ; -93.07,-997.4 -93.07,-897.4 ; 89.43,-3272.4 89.43,-672.4 ; 94.43,-3272.4 94.43,-672.4 ; 933.6,-3272.4 933.6,-672.4 ; 1740.27,-3472.4 1740.27,-672.4 ; 2295.27,-3472.4 2295.27,-672.4 ; 3454.43,-3472.4 3454.43,-472.4 ; -143.07,-3247.4 -143.07,-3147.4 ; -143.07,-3247.4 -43.07,-3147.4 ; -143.07,-3247.4 -43.07,-3247.4 ; -143.07,-3147.4 -43.07,-3147.4 ; -143.07,-3147.4 -43.07,-3247.4 ; -118.07,-1572.4 -68.07,-1522.4 ; -118.07,-1572.4 -118.07,-1522.4 ; -118.07,-1572.4 -68.07,-1572.4 ; -118.07,-1522.4 -68.07,-1572.4 ; -118.07,-1522.4 -68.07,-1522.4 ; -68.07,-1572.4 -68.07,-1522.4 ; -43.07,-3247.4 -43.07,-3147.4 ; -275.57,-3472.4 -275.57,-472.4 3449.43,-472.4 3449.43,-3472.4 -275.57,-3472.4 ; -143.07,-3047.4 -93.07,-3097.4 -43.07,-3047.4 -93.07,-2997.4 -143.07,-3047.4 ; -143.07,-1097.4 -143.07,-1047.4 -93.07,-1047.4 -93.07,-1147.4 -43.07,-1147.4 -43.07,-1097.4 -143.07,-1097.4 ; -143.07,-997.4 -43.07,-997.4 -43.07,-897.4 -143.07,-897.4 -143.07,-997.4 ; -118.07,-2607.4 -118.07,-2587.4 -103.07,-2572.4 -83.07,-2572.4 -68.07,-2587.4 -68.07,-2607.4 -83.07,-2622.4 -103.07,-2622.4 -118.07,-2607.4 ; -118.07,-2457.4 -93.07,-2432.4 -68.07,-2457.4 -68.07,-2437.4 -93.07,-2462.4 -118.07,-2437.4 -118.07,-2457.4 ; -118.07,-2297.4 -93.07,-2272.4 -68.07,-2297.4 -93.07,-2322.4 -118.07,-2297.4 ; -118.07,-2157.4 -68.07,-2157.4 -93.07,-2132.4 -118.07,-2157.4 ; -118.07,-2007.4 -118.07,-1987.4 -103.07,-1972.4 -83.07,-1972.4 -68.07,-1987.4 -68.07,-2007.4 -83.07,-2022.4 -103.07,-2022.4 -118.07,-2007.4 ; -118.07,-1847.4 -118.07,-1822.4 -93.07,-1822.4 -93.07,-1872.4 -68.07,-1872.4 -68.07,-1847.4 -118.07,-1847.4 ; -118.07,-1722.4 -118.07,-1672.4 -68.07,-1672.4 -68.07,-1722.4 -118.07,-1722.4 ; -103.07,-2587.4 -98.07,-2587.4 -98.07,-2582.4 -103.07,-2582.4 -103.07,-2587.4 ; -88.07,-2587.4 -83.07,-2587.4 -83.07,-2582.4 -88.07,-2582.4 -88.07,-2587.4
  text "DRILL CHART" at 1072.35,-612.4 h80
  text "SYM" at -225.57,-812.4 h80
  text "DIAM" at 339.85,-812.4 h80
  text "TOL" at 1208.6,-812.4 h80
  text "QTY" at 1885.27,-812.4 h80
  text "NOTE" at 2692.35,-812.4 h80
  text "0.020" at 525.83,-973.34 h55
  text "259" at 2005.27,-973.34 h55
  text "0.028" at 525.83,-1123.34 h55
  text "36" at 2075.27,-1123.34 h55
  text "0.031" at 536.94,-1273.34 h55
  text "4" at 2145.27,-1273.34 h55
  text "0.034" at 525.83,-1423.34 h55
  text "256" at 2005.27,-1423.34 h55
  text "0.038" at 525.83,-1573.34 h55
  text "150" at 2016.38,-1573.34 h55
  text "0.040" at 525.83,-1723.34 h55
  text "2" at 2145.27,-1723.34 h55
  text "0.052" at 525.83,-1873.34 h55
  text "8" at 2145.27,-1873.34 h55
  text "0.055" at 525.83,-2023.34 h55
  text "3" at 2145.27,-2023.34 h55
  text "0.060" at 525.83,-2173.34 h55
  text "2" at 2145.27,-2173.34 h55
  text "0.080" at 525.83,-2323.34 h55
  text "4" at 2145.27,-2323.34 h55
  text "0.100" at 536.94,-2473.34 h55
  text "11" at 2097.5,-2473.34 h55
  text "0.116" at 548.06,-2623.34 h55
  text "4" at 2145.27,-2623.34 h55
  text "0.120" at 536.94,-2773.34 h55
  text "3" at 2145.27,-2773.34 h55
  text "0.128" at 536.94,-2923.34 h55
  text "2" at 2145.27,-2923.34 h55
  text "0.160" at 536.94,-3073.34 h55
  text "3" at 2145.27,-3073.34 h55
  text "0.190" at 536.94,-3223.34 h55
  text "1" at 2156.38,-3223.34 h55
  text "TOTAL" at 509.02,-3412.4 h80
  text "748" at 1930.27,-3412.4 h80